# EAGLE board TemperatureSensor (EAGLE 7.3.0)
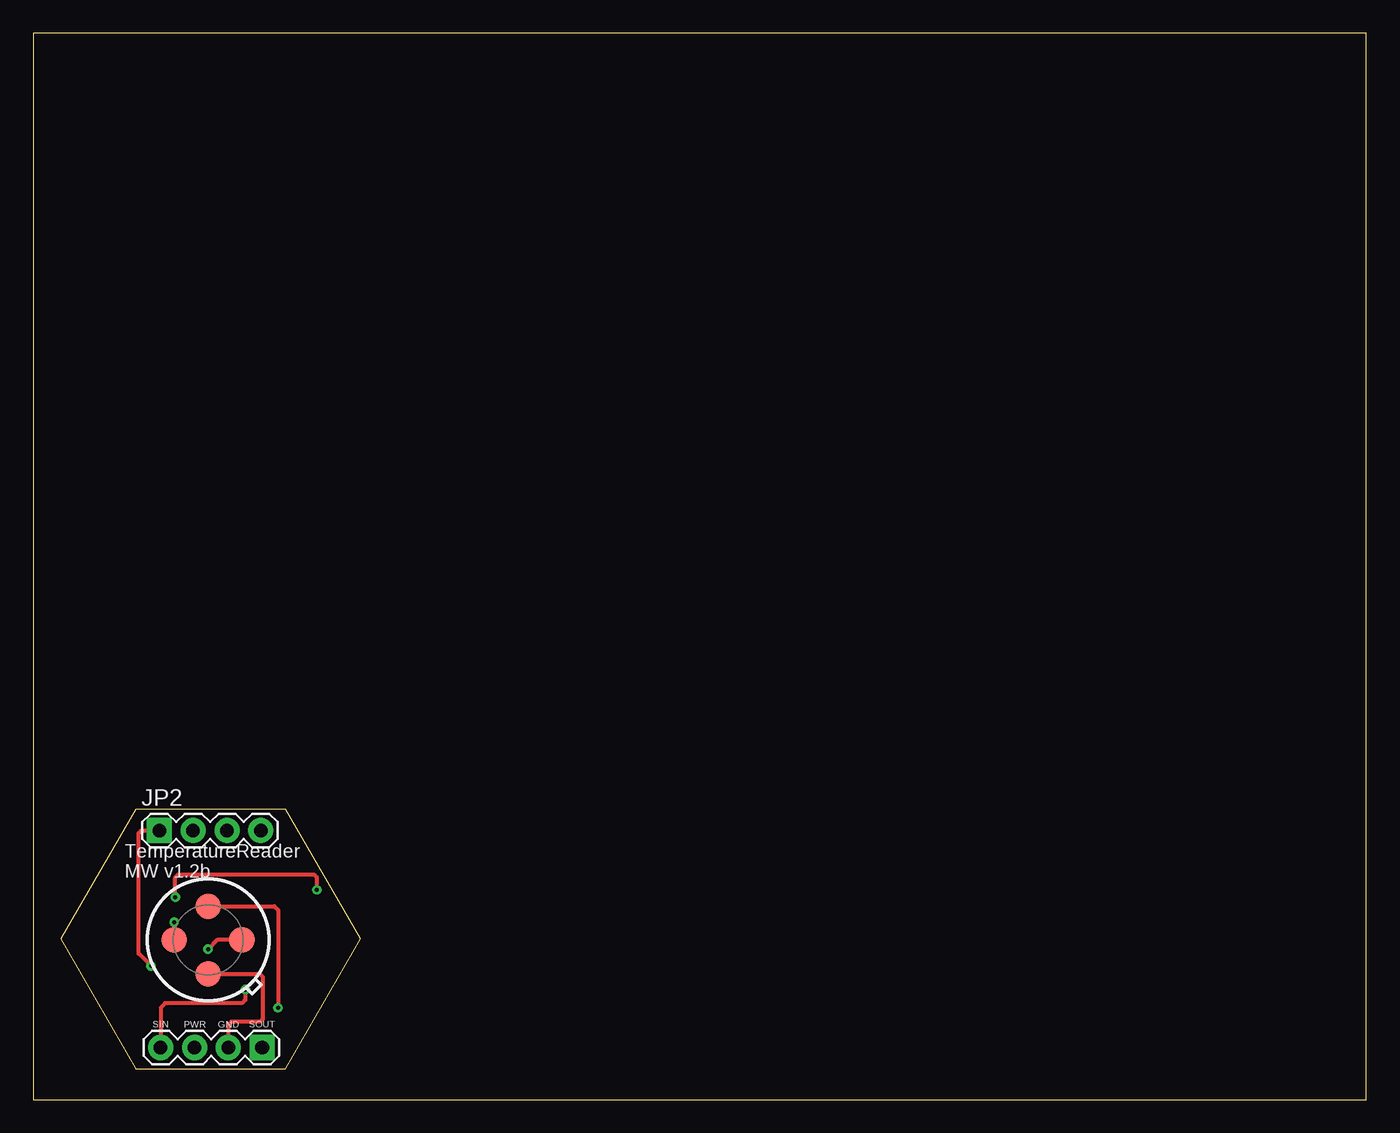
[diagram p0: board, top side]
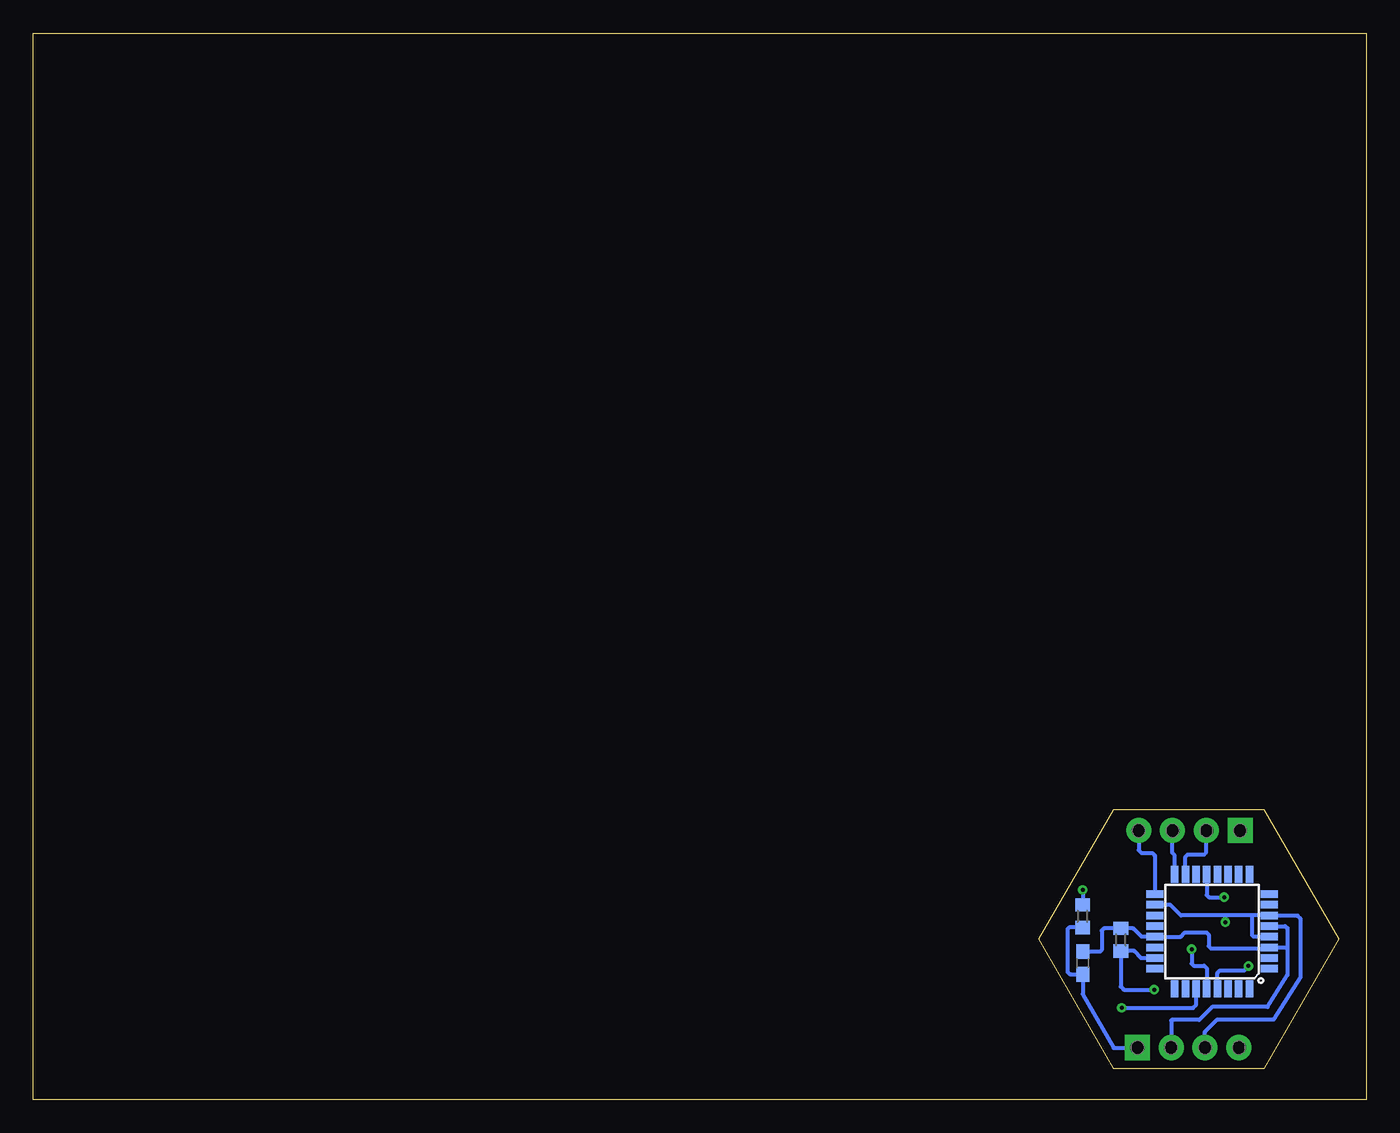
[diagram p1: board, bottom side, seen from below]

Size 100 x 80 mm. Coordinates in mm from the lower left corner, seen from the top.
Outline: 0,0 100,0 100,80 0,80 0,0
Outline: 7.69,2.3 18.94,2.3 24.56,12.04 18.94,21.78 7.69,21.78 2.06,12.04 7.69,2.3
Copper layers (1*16): Top 0.035mm / dielectric 1.5mm / Bottom 0.035mm
Design rules "default *": minimum track width 10mil, minimum drill 24mil, track to track 8mil, track to pad 8mil, pad to pad 8mil, via to via 8mil, smd to smd 8mil, copper to edge 0mil, drill to drill 8mil, minimum pad ring 10mil, minimum via ring 8mil, stop-mask expansion 4mil, vias tented up to drill 0mil, thermal gap 10mil

## Footprints (pad centres in the part's own frame; a part is rotated, then mirrored left to right if it is on the bottom)
C0603 = smd 1.1 x 1: 1 -0.85,0; 2 0.85,0
1X04 = drill 1.016 pad 1.88 square: 1 0,0 | drill 1.016 pad 1.88: 2 2.54,0; 3 5.08,0; 4 7.62,0
R0603 = smd 1 x 1.1: 1 -0.85,0; 2 0.85,0
TO-39 = smd 1.905 x 1.905: PWM 0,2.54; SCL 2.54,0; VDD -2.54,0; VSS 0,-2.54
TQFP32-08 = smd 1.27 x 0.559: 1 -4.293,2.8; 2 -4.293,2; 3 -4.293,1.2; 4 -4.293,0.4; 5 -4.293,-0.4; 6 -4.293,-1.2; 7 -4.293,-2; 8 -4.293,-2.8; 17 4.293,-2.8; 18 4.293,-2; 19 4.293,-1.2; 20 4.293,-0.4; 21 4.293,0.4; 22 4.293,1.2; 23 4.293,2; 24 4.293,2.8 | smd 0.559 x 1.27: 9 -2.8,-4.293; 10 -2,-4.293; 11 -1.2,-4.293; 12 -0.4,-4.293; 13 0.4,-4.293; 14 1.2,-4.293; 15 2,-4.293; 16 2.8,-4.293; 25 2.8,4.293; 26 2,4.293; 27 1.2,4.293; 28 0.4,4.293; 29 -0.4,4.293; 30 -1.2,4.293; 31 -2,4.293; 32 -2.8,4.293

## Placement (x,y rotation side)
C3  0.22uF  [C0603]  21.26,10.25 90 bottom
JP1  [1X04]  17.17,3.9 180 top
JP2  [1X04]  9.45,20.18 0 top
R1  1M  [R0603]  18.41,11.99 270 bottom
R4  4.7K  [R0603]  21.28,13.76 90 bottom
U1  MLX90614  [TO-39]  13.11,11.97 0 top
U2  ATMEGA328P_TQFP  [TQFP32-08]  11.56,12.61 180 bottom

## Library data of the parts
C3 R1 R4 = adafruit
JP1 JP2 = SparkFun-Connectors
U1 = MakerWear
U2 = SparkFun-DigitalIC; PROD_ID: IC-09069

## Nets
1X3SIN: JP1.4 R1.2 U2.23
1X3SOUT: C3.1 JP1.1 R4.1
GND: C3.2 JP1.2 R1.1 U1.VSS U2.3 U2.5 U2.21
MISO: JP2.3 U2.16
MOSI: JP2.2 U2.15
OUT: R4.2 U2.13
RESET: JP2.1 U2.29
SCK: JP2.4 U2.17
SCL: U1.SCL U2.28
SDA: U1.PWM U2.27
VCC: JP1.3 U1.VDD U2.4 U2.6 U2.18

## Tracks (layer width: path | path; a pad name or v marks a point on that pad's centre or on a via)
1X3SIN  (via drill 0.3 pad 0.25)
  Top 0.305: v15.91,8.25 15.91,7.48 15.66,7.23 9.89,7.23 9.56,6.9 JP1.4
  Bottom 0.305: U2.23 16.88,10.61 17.41,11.14 R1.2 18.41,8.48 18.18,8.25 v15.91,8.25
1X3SOUT
  Bottom 0.305: R4.1 22.28,12.91 22.41,12.78 22.41,9.58 22.23,9.4 C3.1 21.26,7.9 18.94,3.88 JP1.1
GND
  Top 0.305: U1.VSS 16.99,9.42 17.21,9.2 17.21,6.05 17,5.84 14.88,5.84 14.63,5.59 JP1.2
  Bottom 0.305: C3.2 19.97,11.1 19.84,11.23 19.84,12.68 19.68,12.84 R1.1 17.47,12.84 16.84,12.21 U2.21 13.92,12.21 13.6,12.53 11.98,12.53 11.81,12.36 11.81,11.51 11.64,11.34 7.34,11.34 U2.3 5.99,11.41 5.91,11.33 | U2.5 6.07,13.01 5.91,12.85 5.91,11.33 | 5.91,11.33 5.91,9.34 7.41,6.95 11.56,6.95 12.53,5.98 14.58,5.98 14.63,5.93 JP1.2
MISO
  Bottom 0.305: U2.16 14.36,18.31 14.53,18.48 JP2.3
MOSI
  Bottom 0.305: U2.15 13.56,18.21 13.39,18.38 12.17,18.38 12,18.55 JP2.2
OUT  (via drill 0.3 pad 0.25)
  Top 0.305: v10.66,15.18 10.66,16.68 10.86,16.88 21.06,16.88 21.27,16.67 v21.27,15.73
  Bottom 0.305: U2.13 11.96,15.33 11.8,15.17 v10.67,15.17 v10.66,15.18 | v21.27,15.73 R4.2
RESET  (via drill 0.3 pad 0.25)
  Top 0.305: v8.84,10.02 v8.83,10.02 7.89,10.96 7.89,19.98 8.09,20.18 JP2.1
  Bottom 0.305: U2.29 11.16,9.5 10.97,9.69 9.16,9.69 v8.84,10.02
SCK
  Bottom 0.305: JP2.4 17.07,18.71 16.86,18.5 16.05,18.5 15.86,18.31 U2.17
SCL  (via drill 0.3 pad 0.25)
  Top 0.305: U1.SCL 13.79,11.97 v13.1,11.28
  Bottom 0.305: U2.28 11.96,9.85 12.15,10.04 12.95,10.04 13.1,10.19 v13.1,11.28
SDA  (via drill 0.3 pad 0.25)
  Top 0.305: U1.PWM 18.07,14.51 18.36,14.22 v18.36,6.89 v18.35,6.88
  Bottom 0.305: v18.35,6.88 13,6.88 12.76,7.12 U2.27
VCC  (via drill 0.3 pad 0.25)
  Top 0.305: U1.VDD v10.57,13.3
  Bottom 0.305: U2.4 8.44,12.21 8.55,12.32 8.55,13.81 | 8.55,13.81 10.56,13.81 | 10.56,13.81 13.89,13.81 14.68,14.6 U2.18 | 8.55,13.81 U2.6 7.25,13.79 5.16,13.79 4.91,13.54 4.91,9.21 6.94,6.01 11.16,6.01 12.09,5.08 JP1.3 | v10.57,13.3 10.57,13.8 10.56,13.81

## Text on the board
tPlace: TemperatureReader / MW v1.2b | SIN | PWR | GND | SOUT